# Altium PCB PLL_PCB.PcbDoc (part 3 of 3)
Units mil, origin at the board's own origin, x right, y up, seen from the top; angles counter-clockwise.
Board outline 5844 x 4441 mil, 4 copper layers (Top Layer, GND Layer, Power Layer, Bottom Layer), stack 22.156 mil thick; 143 components, 61 nets, 427 pads, 2616 vias.
Unrouted connection lines stored in the file: 5.
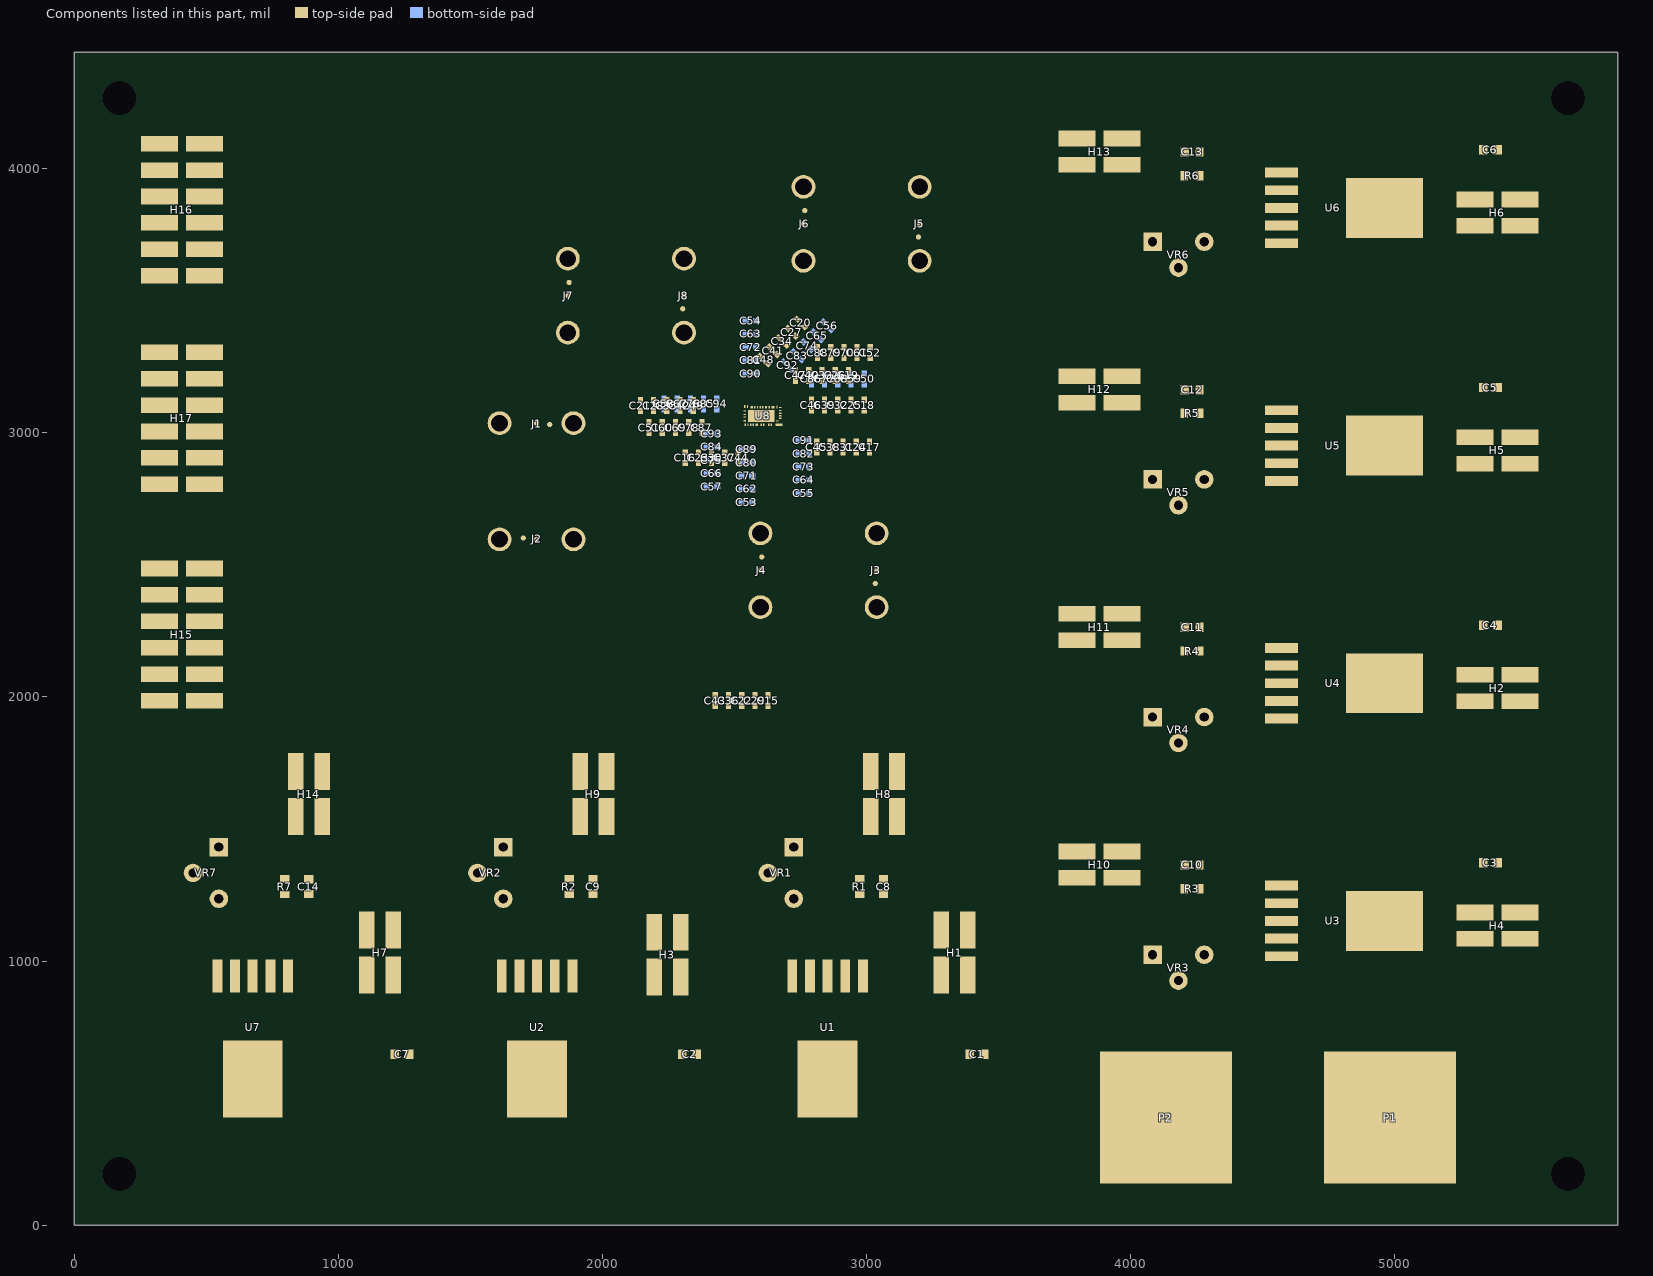
[diagram p5: the components of this part, seen from the top]

## Silkscreen, mask and mechanical layers (free items; w line width, h text height) (continued)
Top Solder:
  rectangle: 2589.01,2931.84 2683.11,3045.17
  lines w60: 1750,2597 1750,2781 1781,2812 1814.59,2812 1858.18,2812 2568.88,2812 2611.01,2854.13 2611.01,3031.04 ; 1750,3037 1750,2853 1781,2822 1818.73,2822 1858.18,2822 2564.73,2822 2601.01,2858.28 2601.01,3031.04 ; 1868.5,3520 2054.55,3520 2083.5,3491.05 2083.5,3281.16 ; 2085,3279.66 2119.34,3245.31 2327.01,3245.31 2512.29,3060.04 2539.01,3060.04 ; 2093.5,3285.3 2093.5,3491.05 2122.45,3520 2308.5,3520 ; 2095,3283.8 2123.48,3255.31 2331.15,3255.31 2516.43,3070.04 2539.01,3070.04 ; 2536.01,3100.04 2536.01,3113.63 2506.68,3142.96 2506.68,3328.16 2691.52,3513 2870.15,3513 2975.49,3618.34 2975.78,3619.06 ; 2546.01,3100.04 2546.01,3117.77 2516.68,3147.1 2516.68,3324.01 2695.67,3503 2874.29,3503 2985.49,3614.2 2985.78,3614.92 ; 2598.01,2480 2782.44,2480 2813.01,2510.58 2813.01,2563.94 2813.01,2823.17 2788.94,2847.24 2662.94,2973.24 ; 2629.01,3031.04 2629.01,3007.17 2652.94,2983.24 ; 2639.01,3031.04 2639.01,3011.31 2660.01,2990.31 ; 2761,3792 2946,3792 2976,3762 2976,3619.28 ; 2986,3615.14 2986,3762 3016,3792 3201,3792 ; 3038.01,2480 2853.59,2480 2823.01,2510.58 2823.01,2559.8 2823.01,2827.31 2803.08,2847.24 ; 2652.94,2983.24 2662.94,2973.24 ; 2652.94,2983.24 2652.94,2983.24 ; 2660.01,2990.31 2803.08,2847.24 ; 2660.01,2990.31 2660.01,2990.31 ; 2662.94,2973.24 2662.94,2973.24 ; 2803.08,2847.24 2803.08,2847.24
Mechanical 1:
  the board outline again, w10